# Altium PCB BMS.PcbDoc
Units mm, origin at the board's own origin, x right, y up, seen from the top; angles counter-clockwise.
Board outline 93 x 80.8 mm, 2 copper layers (Top Layer, Bottom Layer); 78 components, 53 nets, 226 pads, 51 vias.
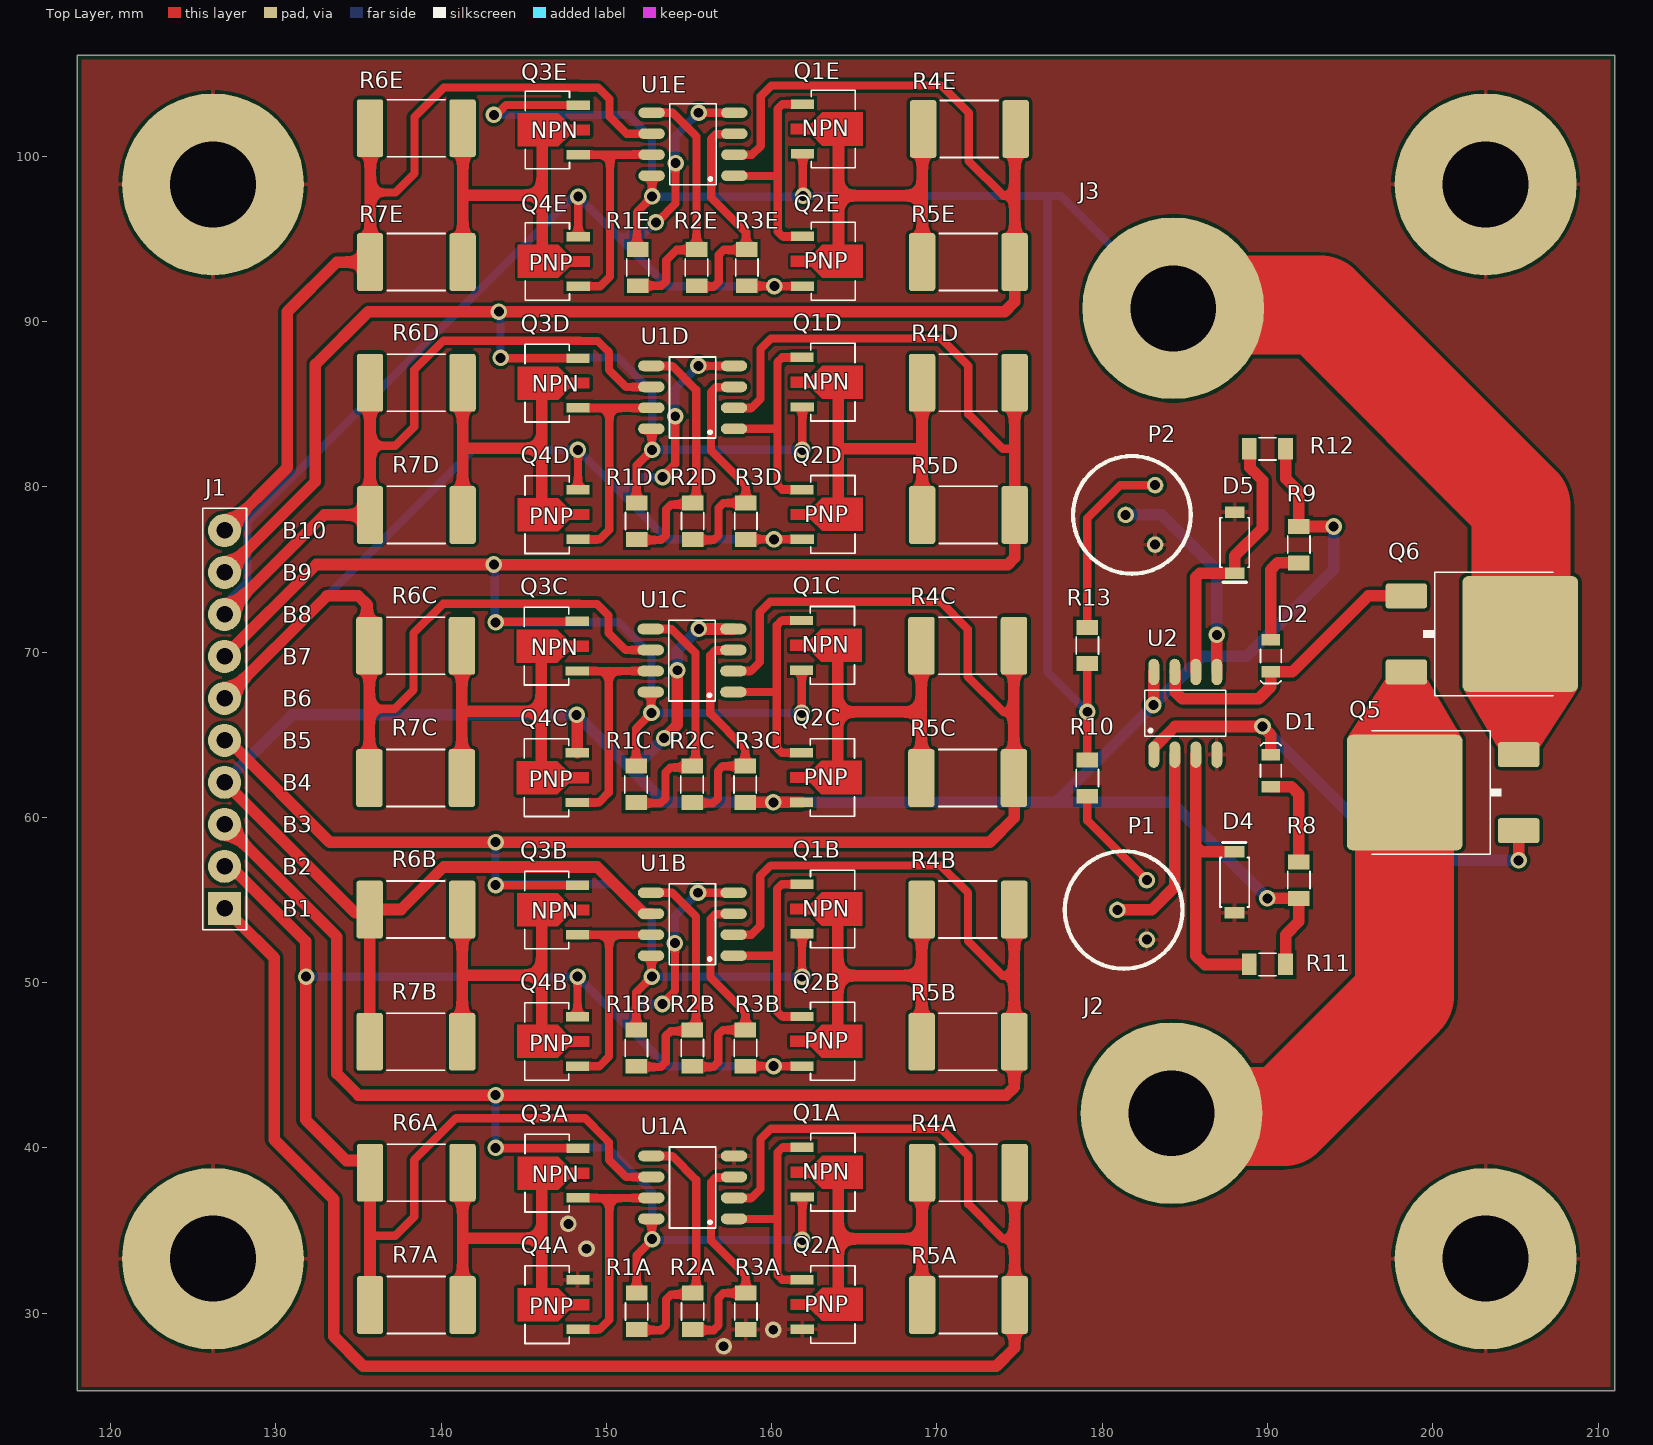
[diagram p0: Top Layer view]
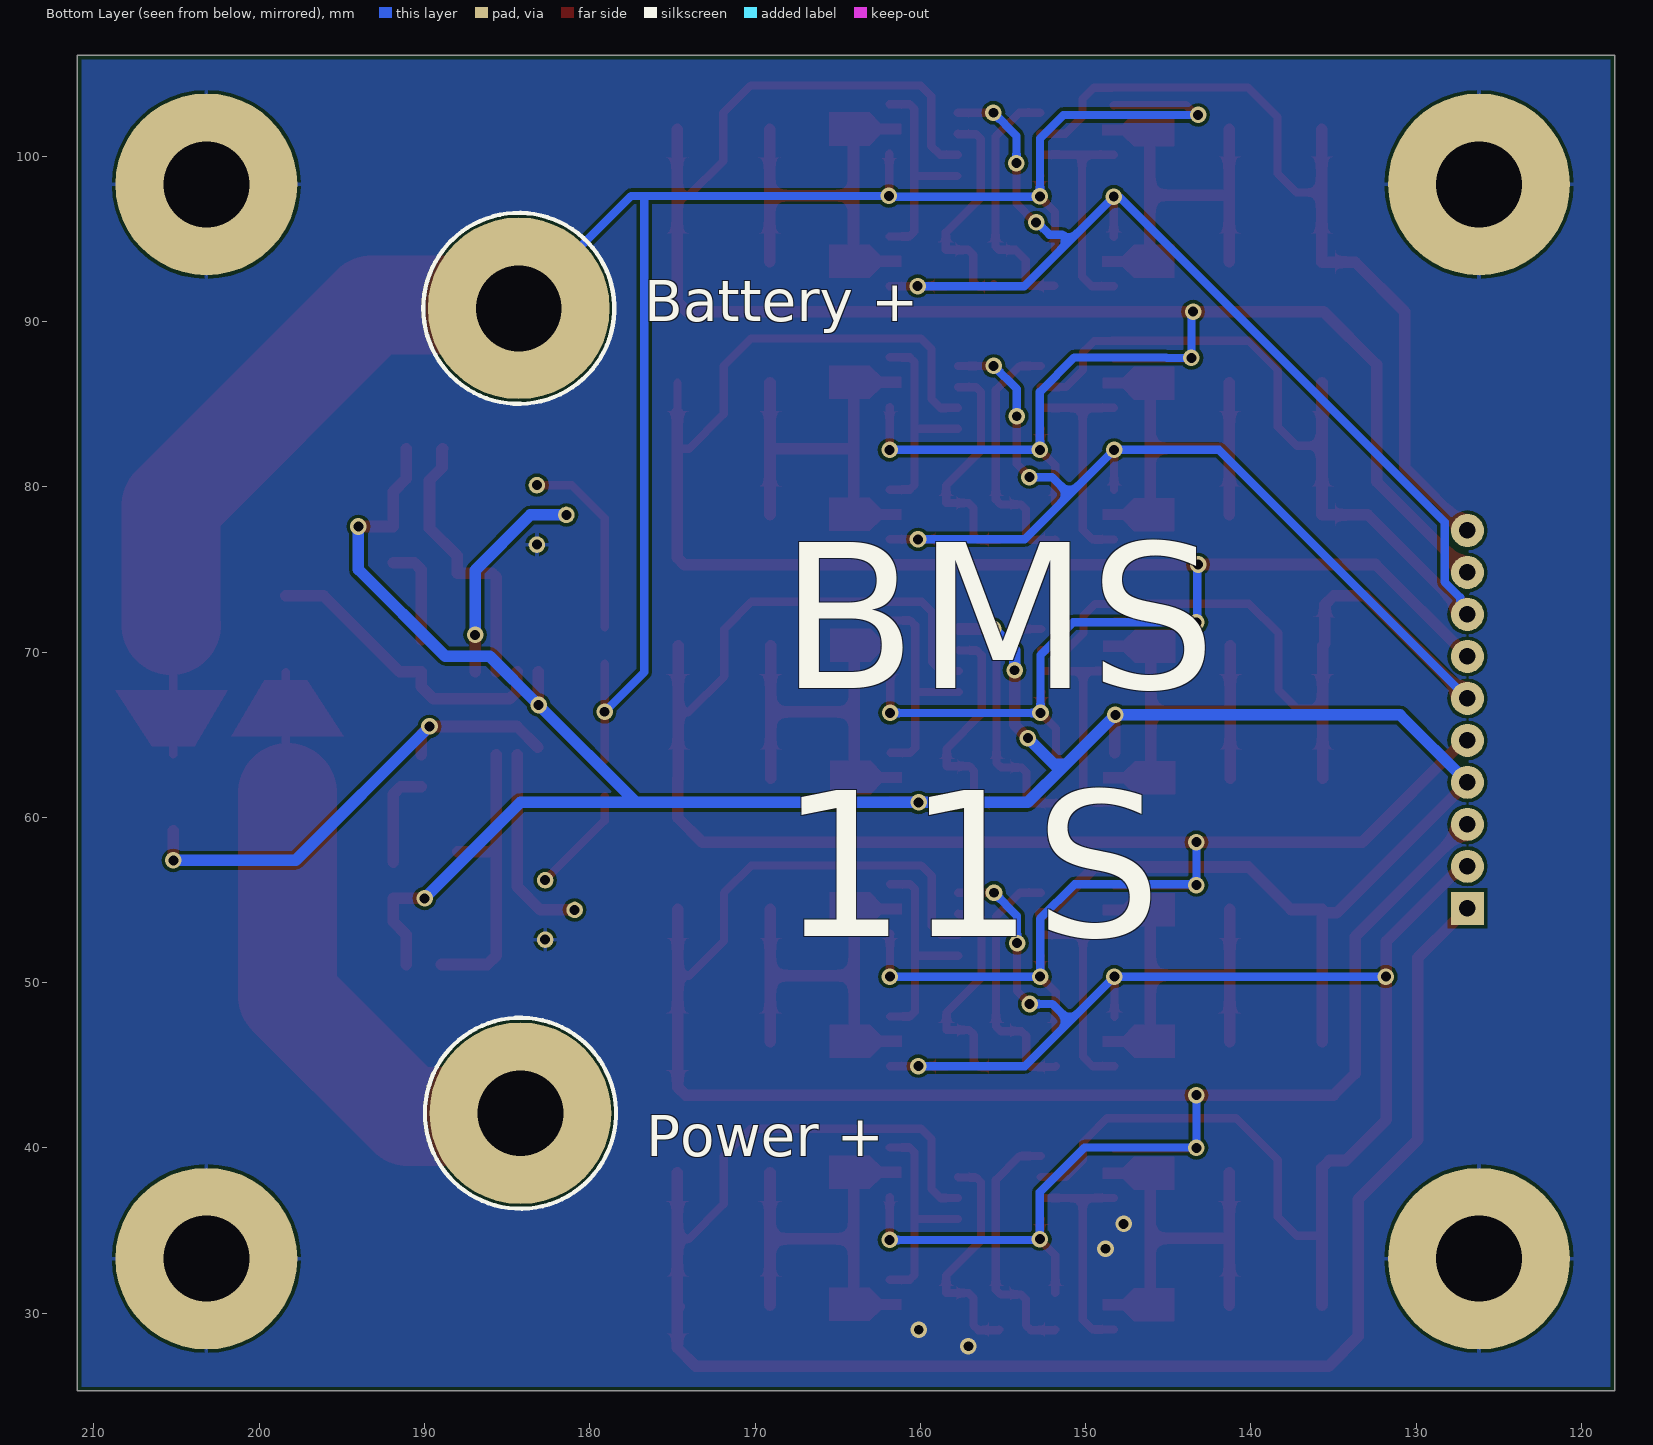
[diagram p1: Bottom Layer view, seen from below]
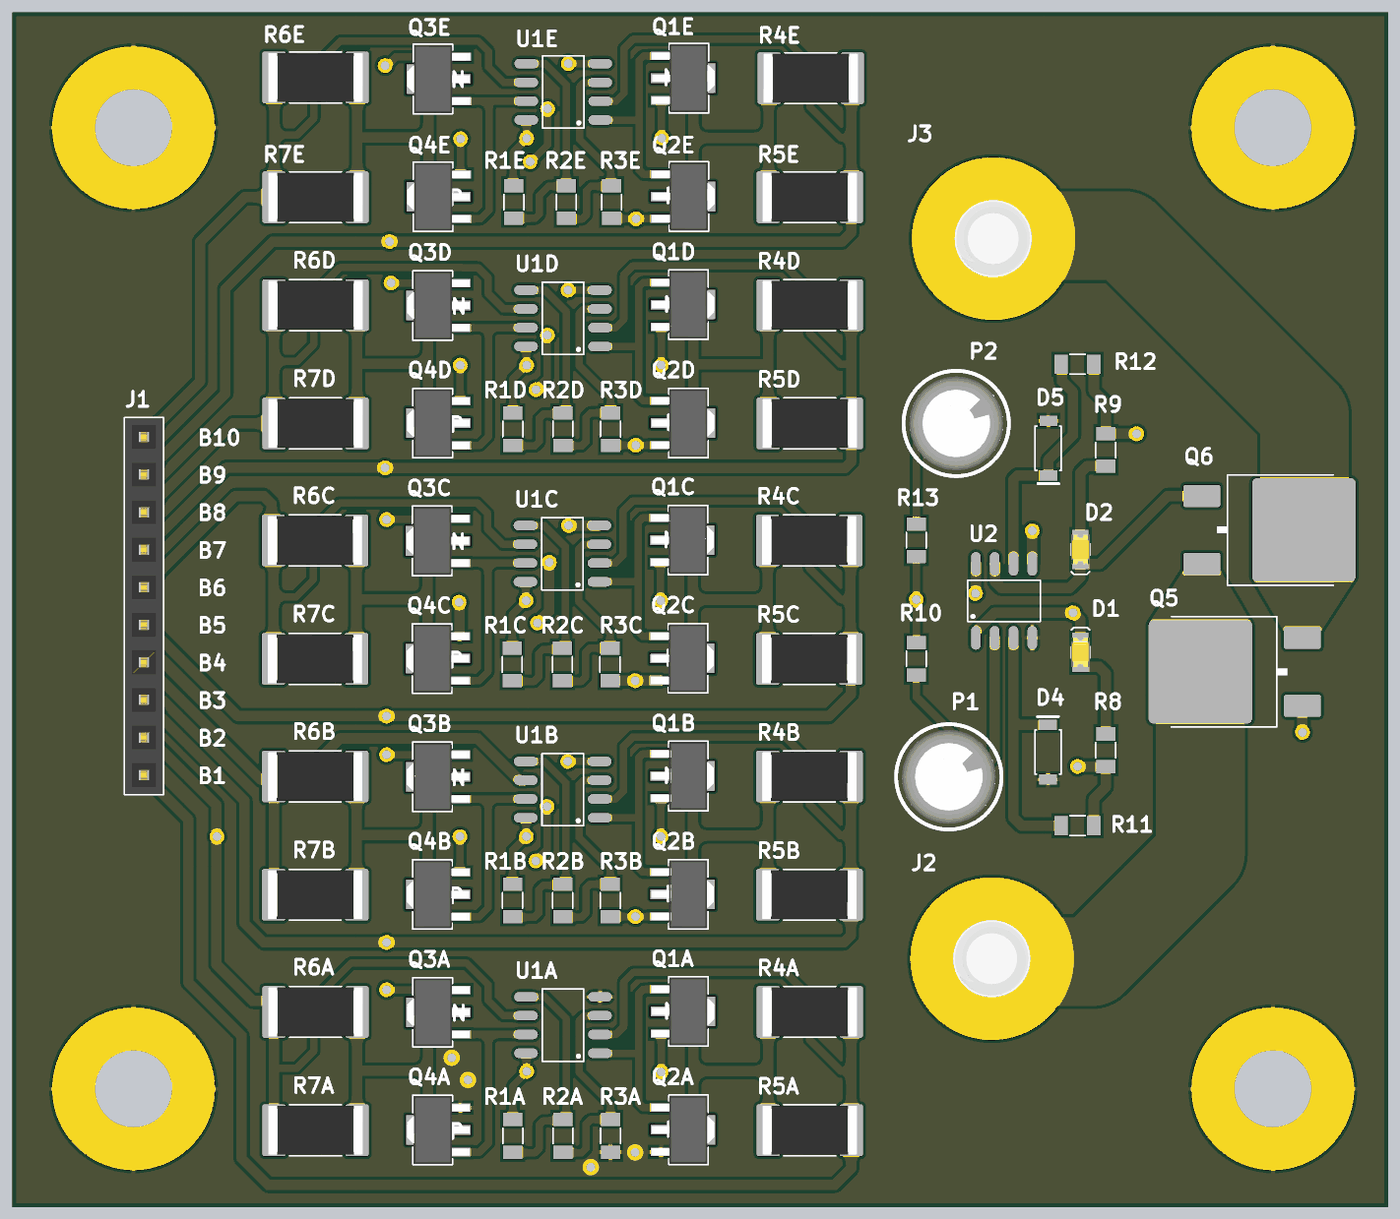
[diagram p2: 3D render of the assembled board from above, using the file's embedded part models]

## Layer stack, top to bottom
Top Solder: solder mask 0.0102, Solder Resist, Dk 3.5
Top Layer: signal copper 0.0356
Dielectric 1: dielectric 0.32, FR-4, Dk 4.8
Bottom Layer: signal copper 0.0356
Bottom Solder: solder mask 0.0102, Solder Resist, Dk 3.5

## Board outline
118,25.3 118,106.1 211,106.1 211,92.9 211,25.3

## Design rules (kind name [scope] priority, off if disabled: settings)
AcuteAngle [All] p1: minimum=3.50000000000000E+0001 checktracksonly=FALSE
BoardOutlineClearance "BoardOutlineClearance 1" [All] p1: gap=0.25 ignorepadtopadclearanceinfootprint=FALSE except(0: Arc-SplitContinuation Track-SplitContinuation SMDPad-SplitContinuation THPad-SplitContinuation Via-SplitContinuation Fill-SplitContinuation Poly-SplitContinuation Region-SplitContinuation Text-SplitContinuation) // Milling
Clearance "Clearance-1 1/2 Oz" [All] p1: gap=0.125 ignorepadtopadclearanceinfootprint=FALSE except(0.2: Arc-Fill Arc-Poly Track-Fill Track-Poly SMDPad-SMDPad SMDPad-Fill SMDPad-Poly THPad-Fill THPad-Poly Via-Fill Via-Poly Fill-Fill Fill-Poly Poly-Poly Poly-Region Poly-Text; 0.25: Arc-Hole Track-Hole SMDPad-Hole THPad-Hole Via-Hole Fill-Hole Poly-Hole Region-Hole Text-Hole) // Standart
ComponentClearance [All] p1: gap=0.1 collisioncheckmode=3 verticalgap=0.1 showdistances=FALSE
DiffPairsRouting "DiffPairsRouting 1/2 Oz" [All] p1: maxlimit=0.254 minlimit=0.125 mostfreqgap=0.254 toplayer_minwidth=0.125 toplayer_maxwidth=0.381 toplayer_prefwidth=0.381 bottomlayer_minwidth=0.125 bottomlayer_maxwidth=0.381 bottomlayer_prefwidth=0.381 maxuncoupledlength=12.7
HoleSize "Minimum HoleSize" [IsPad] p1: absolutevalues=TRUE maxlimit=5.9 minlimit=0.6 maxpercent=80.000 minpercent=20.000
HoleSize "Minimum HoleSize VIA 1" [IsVia] p2: absolutevalues=TRUE maxlimit=5.9 minlimit=0.3 maxpercent=80.000 minpercent=20.000 // Standart
HoleToHoleClearance Hole2HoleClearance [All] p1: gap=0.25 allowstackedmicrovias=FALSE
MinimumAnnularRing "Minimum AR VIA Standart" [All] p1: minimumring=0.15
MinimumAnnularRing "Minimum AR PAD Standart" [All] p2: minimumring=0.2
MinimumSolderMaskSliver "SolderMask Bridge Standart" [All] p1: minsoldermaskwidth=0.15 // All Masks
PlaneClearance "PlaneClearance-1 1/2 Oz" [All] p1: clearance=0.2 // Standart
PlaneConnect "TermalConnect-1 1/2 Oz" [All] p1: planeconnectstyle=Relief reliefexpansion=0.2 reliefentries=4 reliefconductorwidth=0.2 reliefairgap=0.2 // Standart
PolygonConnect "PolygonConnect-1 1/2 Oz" [All] p1: thpad.connectstyle=Relief thpad.reliefconductorwidth=0.254 thpad.reliefentries=4 thpad.polygonreliefangle="90 Angle" thpad.airgapwidth=0.2 smdpad.connectstyle=Relief smdpad.reliefconductorwidth=0.254 smdpad.reliefentries=4 smdpad.polygonreliefangle="90 Angle" smdpad.airgapwidth=0.2 via.connectstyle=Direct via.reliefconductorwidth=0.254 via.reliefentries=4 via.polygonreliefangle="90 Angle" via.airgapwidth=0.254 // Standart
RoomDefinition bal1 [InComponentClass('bal1')] p1: confinementstyle=ConfineIn formatcopy=TRUE lockcomponents=FALSE outline 134.228,27.324 176.265,27.324 176.265,43.326 134.228,43.326
RoomDefinition bal2 [InComponentClass('bal2')] p2: confinementstyle=ConfineIn formatcopy=TRUE lockcomponents=FALSE outline 134.209,43.249 176.246,43.249 176.246,59.251 134.209,59.251
RoomDefinition bal3 [InComponentClass('bal3')] p3: confinementstyle=ConfineIn formatcopy=TRUE lockcomponents=FALSE outline 134.19,59.206 176.227,59.206 176.227,75.208 134.19,75.208
RoomDefinition bal4 [InComponentClass('bal4')] p4: confinementstyle=ConfineIn formatcopy=TRUE lockcomponents=FALSE outline 134.228,75.125 176.265,75.125 176.265,91.127 134.228,91.127
RoomDefinition bal5 [InComponentClass('bal5')] p5: confinementstyle=ConfineIn formatcopy=TRUE lockcomponents=FALSE outline 134,91.1 176.3,91.1 176.3,105.9 134,105.9
RoutingCorners [All] p1 off: cornerstyle=45-Degree minsetback=2.54 maxsetback=2.54
RoutingVias [All] p1: holewidth=0.4 width=0.8 viastyle="Through Hole" minholewidth=0.3 minwidth=0.6 maxholewidth=5.9 maxwidth=8.9
SilkToSilkClearance Silk2SilkClearance [All] p1 off: silktosilkclearance=0.15
SilkToSolderMaskClearance Silk2SolderMaskClearance [IsPad] p1 off: minsilkscreentomaskgap=0.15 clearancetoexposedcopper=TRUE
SolderMaskExpansion SolderMaskExpansion-1 [All] p1: expansion=0.05 istentingtop=FALSE // Standart
UnRoutedNet [All] p1: checkbadconnections=TRUE
Width "Width 1/2 Oz" [All] p1: maxlimit=10 minlimit=0.125 preferedwidth=0.254 checkconnectedcopper=TRUE
19 further rules are at their usual default settings.

## Classes and differential pairs
component class BMS: D1 D2 D4 D5 J1 J2 J3 P1 P2 Q5 Q6 R8 R9 R10 R11 R12 R13 U2
component class bal5: Q1E Q2E Q3E Q4E R1E R2E R3E R4E R5E R6E R7E U1E
channel class Balancer: bal1 bal2 bal3 bal4
component class bal4: Q1D Q2D Q3D Q4D R1D R2D R3D R4D R5D R6D R7D U1D
component class bal3: Q1C Q2C Q3C Q4C R1C R2C R3C R4C R5C R6C R7C U1C
component class bal2: Q1B Q2B Q3B Q4B R1B R2B R3B R4B R5B R6B R7B U1B
component class bal1: Q1A Q2A Q3A Q4A R1A R2A R3A R4A R5A R6A R7A U1A

## Components (designator, comment, footprint, x,y, rotation, side; value= is the part's Value field where it differs from the comment)
D1 "LedB" "0805 LED" 190.2,62.825 r90 top
D2 "LedR" "0805 LED" 190.2,69.775 r270 top
D4 "Zener 3V" sod-123 188,54.225 r90 top
D5 "Zener 3V" sod-123 188.025,78.475 r270 top
J1 "PBS 10x1" PBS10 126.9,54.5 r90 top
J2 "Bolt M5" "Bolt M5" 184.2,42.1 r0 top
J3 "Bolt M5" "Bolt M5" 184.3,90.8 r0 top
P1 "3329H" 3329H 181.3,54.4 r90 top
P2 "3329H" 3329H 181.8,78.3 r90 top
Q1A "BCX54-16" SOT-89 162.349,38.531 r270 top (schematic designator Q1)
Q1B "BCX54-16" SOT-89 162.33,54.456 r270 top (schematic designator Q1)
Q1C "BCX54-16" SOT-89 162.311,70.413 r270 top (schematic designator Q1)
Q1D "BCX54-16" SOT-89 162.349,86.332 r270 top (schematic designator Q1)
Q1E "BCX54-16" SOT-89 162.369,101.65 r270 top (schematic designator Q1)
Q2A "BCX51-16" SOT-89 162.349,30.53 r270 top (schematic designator Q2)
Q2B "BCX51-16" SOT-89 162.33,46.455 r270 top (schematic designator Q2)
Q2C "BCX51-16" SOT-89 162.311,62.412 r270 top (schematic designator Q2)
Q2D "BCX51-16" SOT-89 162.349,78.331 r270 top (schematic designator Q2)
Q2E "BCX51-16" SOT-89 162.369,93.649 r270 top (schematic designator Q2)
Q3A "BCX54-16" SOT-89 147.778,38.476 r90 top (schematic designator Q3)
Q3B "BCX54-16" SOT-89 147.759,54.401 r90 top (schematic designator Q3)
Q3C "BCX54-16" SOT-89 147.74,70.358 r90 top (schematic designator Q3)
Q3D "BCX54-16" SOT-89 147.778,86.277 r90 top (schematic designator Q3)
Q3E "BCX54-16" SOT-89 147.798,101.594 r90 top (schematic designator Q3)
Q4A "BCX51-16" SOT-89 147.778,30.518 r90 top (schematic designator Q4)
Q4B "BCX51-16" SOT-89 147.759,46.443 r90 top (schematic designator Q4)
Q4C "BCX51-16" SOT-89 147.74,62.4 r90 top (schematic designator Q4)
Q4D "BCX51-16" SOT-89 147.778,78.319 r90 top (schematic designator Q4)
Q4E "BCX51-16" SOT-89 147.798,93.636 r90 top (schematic designator Q4)
Q5 "MOSFET-N" "D-Pak (TO-252AA)" 205.2,61.5 r90 top
Q6 "MOSFET-N" "D-Pak (TO-252AA)" 198.4,71.1 r270 top
R1A "10k" "0805 Resistor" 151.834,30.118 r90 top (schematic designator R1)
R1B "10k" "0805 Resistor" 151.815,46.043 r90 top (schematic designator R1)
R1C "10k" "0805 Resistor" 151.796,62 r90 top (schematic designator R1)
R1D "10k" "0805 Resistor" 151.834,77.919 r90 top (schematic designator R1)
R1E "10k" "0805 Resistor" 151.901,93.268 r90 top (schematic designator R1)
R2A "10k" "0805 Resistor" 155.223,30.118 r90 top (schematic designator R2)
R2B "10k" "0805 Resistor" 155.204,46.043 r90 top (schematic designator R2)
R2C "10k" "0805 Resistor" 155.185,62 r90 top (schematic designator R2)
R2D "10k" "0805 Resistor" 155.223,77.919 r90 top (schematic designator R2)
R2E "10k" "0805 Resistor" 155.457,93.268 r90 top (schematic designator R2)
R3A "10k" "0805 Resistor" 158.438,30.118 r90 top (schematic designator R3)
R3B "10k" "0805 Resistor" 158.419,46.043 r90 top (schematic designator R3)
R3C "10k" "0805 Resistor" 158.4,62 r90 top (schematic designator R3)
R3D "10k" "0805 Resistor" 158.438,77.919 r90 top (schematic designator R3)
R3E "10k" "0805 Resistor" 158.505,93.268 r90 top (schematic designator R3)
R4A "62R" "2512 Resistor" 171.9,38.5 r0 top (schematic designator R4)
R4B "62R" "2512 Resistor" 171.881,54.425 r0 top (schematic designator R4)
R4C "62R" "2512 Resistor" 171.862,70.382 r0 top (schematic designator R4)
R4D "62R" "2512 Resistor" 171.9,86.301 r0 top (schematic designator R4)
R4E "62R" "2512 Resistor" 171.967,101.65 r0 top (schematic designator R4)
R5A "62R" "2512 Resistor" 171.9,30.499 r0 top (schematic designator R5)
R5B "62R" "2512 Resistor" 171.881,46.424 r0 top (schematic designator R5)
R5C "62R" "2512 Resistor" 171.862,62.381 r0 top (schematic designator R5)
R5D "62R" "2512 Resistor" 171.9,78.3 r0 top (schematic designator R5)
R5E "62R" "2512 Resistor" 171.9,93.6 r0 top (schematic designator R5)
R6A "62R" "2512 Resistor" 138.499,38.5 r180 top (schematic designator R6)
R6B "62R" "2512 Resistor" 138.48,54.425 r180 top (schematic designator R6)
R6C "62R" "2512 Resistor" 138.461,70.382 r180 top (schematic designator R6)
R6D "62R" "2512 Resistor" 138.499,86.301 r180 top (schematic designator R6)
R6E "62R" "2512 Resistor" 138.5,101.7 r180 top (schematic designator R6)
R7A "62R" "2512 Resistor" 138.499,30.499 r180 top (schematic designator R7)
R7B "62R" "2512 Resistor" 138.48,46.424 r180 top (schematic designator R7)
R7C "62R" "2512 Resistor" 138.461,62.381 r180 top (schematic designator R7)
R7D "62R" "2512 Resistor" 138.499,78.3 r180 top (schematic designator R7)
R7E "62R" "2512 Resistor" 138.5,93.6 r180 top (schematic designator R7)
R8 "1k" "0805 Resistor" 191.9,56.2 r270 top
R9 "1k" "0805 Resistor" 191.9,76.5 r90 top
R10 "Res 100k" "0805 Resistor" 179.1,62.381 r90 top
R11 "4k" "0805 Resistor" 190,51.1 r0 top
R12 "4k" "0805 Resistor" 190,82.301 r0 top
R13 "Res 100k" "0805 Resistor" 179.1,70.4 r270 top
U1A "OpAmp" SOIC-8 157.723,35.706 r180 top (schematic designator U1)
U1B "OpAmp" SOIC-8 157.704,51.631 r180 top (schematic designator U1)
U1C "OpAmp" SOIC-8 157.685,67.588 r180 top (schematic designator U1)
U1D "OpAmp" SOIC-8 157.723,83.507 r180 top (schematic designator U1)
U1E "OpAmp" SOIC-8 157.743,98.824 r180 top (schematic designator U1)
U2 "LM290" SOIC-8 183.13,63.8 r90 top

## Footprints (in the part's own frame and the unit in brackets; to place one, negate y for a bottom-side part, rotate by r counter-clockwise, add the part's x,y. Pads: shape width x height; smd on the part's side, far side on the other; paste and mask are expansions set on the pad)
"0805 LED" [mm]
  rect 0.7x1.1 smd: 1(-0.975,0) 2(0.975,0)
  silkscreen extent -0.4,-0.63 1.68,0.63, body extent -1.01,-0.62 1.01,0.62, height 1.1
"0805 Resistor" [mm]
  rect 0.9x1.3 smd: 1(-1.1,0) 2(1.1,0)
  silkscreen extent -0.53,-0.67 0.53,0.67, body extent -1.05,-0.67 1.05,0.68, height 0.6
"2512 Resistor" [mm]
  rrect20% 1.6x3.5 smd: 1(-2.8,0) 2(2.8,0)
  silkscreen extent -1.75,-1.73 1.75,1.73, body extent -3.2,-1.65 3.2,1.65, height 0.65
3329H [mm]
  round 1 hole 0.6: 1(-1.8,-1.4) 2(0,0.38) 3(1.8,-1.4)
  silkscreen extent -3.56,-3.56 3.56,3.56, body extent -3.18,-3.18 3.18,3.18, height 4.57
"Bolt M5" [mm]
  round 11 hole 5.2: 1(0,0)
  body extent -4.75,-4.75 4.75,4.75, height 9.5
"D-Pak (TO-252AA)" [mm]
  rrect20% 1.5x2.5 smd: 1(-2.3,0) 3(2.3,0)
  rrect10% 7x7 smd: 2(0,6.9)
  silkscreen extent -3.72,1.03 3.75,8.87, body extent -3.38,-0.65 3.35,9.45, height 2.37
PBS10 [mm]
  rect 2x2 hole 1: 1(0,0)
  round 2 hole 1: 2(2.54,0) 3(5.08,0) 4(7.62,0) 5(10.16,0) 6(12.7,0) 7(15.24,0) 8(17.78,0) 9(20.32,0) 10(22.86,0)
  silkscreen extent -1.3,-1.33 24.2,1.33, body extent -1.25,-1.27 24.15,1.27, height 8.4
sod-123 [mm]
  rect 0.7x1.2 smd: 1(0,0) 2(3.7,0)
  silkscreen extent 0.35,-0.9 4.25,0.87, body extent 0,-0.8 3.7,0.8
SOIC-8 [mm]
  oval 1.6x0.65 smd: 1(0,0) 2(0,-1.27) 3(0,-2.54) 4(0,-3.81) 5(5,-3.81) 6(5,-2.54) 7(5,-1.27) 8(5,0)
  silkscreen extent 1.1,-4.35 3.9,0.55, body extent -0.36,-4.35 5.41,0.55, height 1.45
SOT-89 [mm]
  rect 0.57x1.4 smd: 1(-1.5,-0.5) 3(1.5,-0.5)
  round 0.025 smd: 2(0.031,1.677)
  Top Layer region: -0.325,0.025 -0.325,-1.198 0.325,-1.198 0.325,0.025 1,0.7 1,3.15 -1,3.15 -1,0.7
  silkscreen extent -2.35,0.03 2.35,2.7, body extent -2.3,-1.15 2.3,3.1, height 1.35

## Part data
D1: library part "Led Yellow", "SMD 1608, 247mcd, 120°, 592nM (High Bright Yellow)", Manufacturer="Taiwan Oasis Technology", Part Number=TO-1608BC-MYF, ComponentLink1Description=Chip&Dip, ComponentLink1URL=https://www.chipdip.ru/product/gnl-0603ubc, Type=Diode
D2: library part "Led Red", "SMD 1608, 112mcd, 120°, 630nM (Ultra Bright Red)", Manufacturer="Taiwan Oasis Technology", Part Number=TO-1608BC-MRE, ComponentLink1Description=Chip&Dip, ComponentLink1URL=https://www.chipdip.ru/product/to-1608bc-mre, Type=Diode
D4 D5: library part "Zener Diode 3V", "500mW", Manufacturer="Yangzhou Yangjie Electronic Technology", Part Number=MMSZ5225B, ComponentLink1Description=Chip&Dip, ComponentLink1URL=https://www.chipdip.ru/product/mmsz5225b, ComponentLink2Description=DataSheet, ComponentLink2URL=https://static.chipdip.ru/lib/152/DOC001152772.pdf, Type=Diode
J1: library part "Conn 10 (PBS)", "Female", Manufacturer="Ningbo connfly electronic", Part Number=DS1023-1*10S21, ComponentLink1Description=Chip&Dip, ComponentLink1URL=https://www.chipdip.ru/product/pbs-10r, Type=Connector
J2 J3: library part "Conn Bolt M5", "Bolt M5 high corrent connector", ComponentLink1Description=Chip&Dip, ComponentLink2Description=Datasheet, Type=Connetctor
P1 P2: library part "Pot 15k", "Potentiometr 15k 0.5W", Manufacturer=Vishay, Part Number=M64X203KB40, ComponentLink2Description=Datasheet, ComponentLink2URL=https://static.chipdip.ru/lib/250/DOC000250619.pdf, Type=Potentiometer
Q1A Q1B Q1C Q1D Q1E Q3A Q3B Q3C Q3D Q3E: library part "NPN [BC817]", "NPN general-purpose transistors", Manufacturer=Nexperia, Part Number=BC817-40,215, ComponentLink1Description=DataSheet, ComponentLink1URL=https://static.chipdip.ru/lib/156/DOC000156781.pdf, ComponentLink2Description=Chip&Dip, ComponentLink2URL=https://www.chipdip.ru/product/bc817-40, Type=Transistor
Q2A Q2B Q2C Q2D Q2E Q4A Q4B Q4C Q4D Q4E: library part "PNP [BC807]", "PNP general-purpose transistors", Manufacturer=Nexperia, Part Number=BC807,215, ComponentLink1Description=DataSheet, ComponentLink1URL=https://static.chipdip.ru/lib/078/DOC001078227.pdf, ComponentLink2Description=Chip&Dip, ComponentLink2URL=https://www.chipdip.ru/product/bc807.215, Type=Transistor
Q5 Q6: library part "MOSFET-N [IRLR]", "Trans MOSFET N-CH Si 55V 89A 3-Pin(2+Tab) DPAK Tube", Manufacturer="International Rectifier", Part Number=IRLR3705ZTRPBF, ComponentLink1Description=DataSheet, ComponentLink1URL=https://static.chipdip.ru/lib/292/DOC000292789.pdf, ComponentLink2Description=Chip&Dip, ComponentLink2URL=https://www.chipdip.ru/product/irlr3705zpbf, Type=Transistor
R1A R1B R1C R1D R1E R2A R2B R2C R2D R2E R3A R3B R3C R3D R3E: library part "Res 10k (0805)", "0.125W 0805 10k, 1%", Manufacturer=Taiwan, Part Number=RC0805FR-0710KL, ComponentLink1Description=Chip&Dip, ComponentLink1URL=https://www.chipdip.ru/product0/9000079514, Type=Resistor
R4A R4B R4C R4D R4E R5A R5B R5C R5D R5E R6A R6B R6C R6D R6E R7A R7B R7C R7D R7E: library part "Res 62R (2512)", "1W 2512 62R, 1%", Manufacturer=Taiwan, Part Number=RC2512FR-0762RL, ComponentLink1Description=Chip&Dip, ComponentLink1URL=https://www.chipdip.ru/product0/9000190086, Type=Resistor
R8 R9: library part "Res 3.9k (0805)", "0.125W 0805 3.9k, 1%", Manufacturer=Taiwan, Part Number=RC0805FR-073K9L, ComponentLink1Description=Chip&Dip, ComponentLink1URL=https://www.chipdip.ru/product0/9000079500, Type=Resistor
R10 R13: library part "Res 100k (0805)", "0.125W 0805 100k, 1%", Manufacturer=Taiwan, Part Number=RC0805FR-07100KL, ComponentLink1Description=Chip&Dip, ComponentLink1URL=https://www.chipdip.ru/product0/9000079538, Type=Resistor
R11 R12: library part "Res 6.8k (0805)", "0.125W 0805 6.8k, 1%", Manufacturer=Taiwan, Part Number=RC0805FR-076K8L, ComponentLink1Description=Chip&Dip, ComponentLink1URL=https://www.chipdip.ru/product0/9000079506, Type=Resistor
U1A U1B U1C U1D U1E: library part "OpAmp [LMV358]", "Low Voltage Operational Amplifiers", Manufacturer="Texas Instruments", Part Number=LMV358IDR, ComponentLink1Description=DataSheet, ComponentLink1URL=https://static.chipdip.ru/lib/321/DOC000321492.pdf, ComponentLink2Description=Chip&Dip, ComponentLink2URL=https://www.chipdip.ru/product/lmv358idr-pbf, Type=IC
U2: library part "Comp 2x", "LM290 SOIC-8", ComponentLink1Description=DataSheet, ComponentLink1URL=https://static.chipdip.ru/lib/938/DOC011938774.pdf, ComponentLink2Description=ChipDip, ComponentLink2URL=https://www.chipdip.ru/product/lm2903d-stm

## Free pads (board coordinates)
  round 11 hole 5.2: 3(126.2,33.3) 3(126.2,98.3) 3(203.2,33.3) 3(203.2,98.3)

## Via types
v1: diameter 1, hole 0.6, Top Layer to Bottom Layer, 51 vias

## Nets (pads, with @x,y where several pads share a name; then routed paths per layer and width w, separated by ;. In a path a pad name is that pad's centre, name@x,y a point inside that pad or via, vN(x,y) a via of type N, cw(c..) or ccw(c..) an arc to the next point about the centre after c; other vN are vias at no path point)
1IN+: D4.2 R11.1 U2.3 | length 18.2
  Top Layer w0.7: U2.3 185.67,58.265 ; D4.2 186.01,57.925 185.67,58.265 ; R11.1@188.987,51.1 186.2,51.1 185.67,51.63 185.67,57.925 185.67,58.265
1IN+A: R2A.1 R3A.2 U1A.3 | length 14.2
  Top Layer w0.5: R2A.1 155.266,28.975 156.494,28.975 156.787,29.268 156.787,30.925 157.08,31.218 R3A.2 158.438,32.277 156.326,34.389 156.326,37.924 156.619,38.217 157.694,38.217 U1A.3
1IN+B: R2B.1 R3B.2 U1B.3 | length 14.2
  Top Layer w0.5: R2B.1 155.247,44.9 156.475,44.9 156.768,45.193 156.768,46.85 157.061,47.143 R3B.2 158.419,48.202 156.307,50.314 156.307,53.849 156.6,54.142 157.675,54.142 U1B.3
1IN+C: R2C.1 R3C.2 U1C.3 | length 14.2
  Top Layer w0.5: R2C.1 155.228,60.857 156.456,60.857 156.749,61.15 156.749,62.807 157.042,63.1 R3C.2 158.4,64.159 156.288,66.271 156.288,69.806 156.581,70.099 157.656,70.099 U1C.3
1IN+D: R2D.1 R3D.2 U1D.3 | length 14.2
  Top Layer w0.5: R2D.1 155.266,76.776 156.494,76.776 156.787,77.069 156.787,78.726 157.08,79.019 R3D.2 158.438,80.078 156.326,82.19 156.326,85.725 156.619,86.018 157.694,86.018 U1D.3
1IN+E: R2E.1 R3E.2 U1E.3 | length 14.1
  Top Layer w0.5: R2E.1@155.561,92.272 R2E.1 155.5,92.125 156.514,92.125 156.807,92.418 156.807,94.043 157.1,94.336 158.458,94.336 158.458,95.395 156.346,97.507 156.346,101.043 156.639,101.336 157.714,101.336 U1E.3
1IN-: P1.2 U2.2 | length 12.1
  Top Layer w0.7: P1.2 183,54.4 184.4,55.8 U2.2
1OUTA: Q1A.1 Q2A.1 U1A.1 | length 13.3
  Top Layer w0.5: U1A.1 160.345,35.706 ; Q2A.1 160.643,32.03 160.35,32.323 160.35,35.941 160.35,39.738 160.643,40.031 Q1A.1
1OUTB: Q1B.1 Q2B.1 U1B.1 | length 13.2
  Top Layer w0.5: U1B.1 160.278,51.631 ; Q2B.1 160.624,47.955 160.331,48.248 160.331,51.866 160.331,55.663 160.624,55.956 Q1B.1
1OUTC: Q1C.1 Q2C.1 U1C.1 | length 13.1
  Top Layer w0.5: U1C.1 160.162,67.588 ; Q2C.1 160.605,63.912 160.312,64.205 160.312,67.588 160.312,67.823 160.312,71.62 160.605,71.913 Q1C.1
1OUTD: Q1D.1 Q2D.1 U1D.1 | length 13.2
  Top Layer w0.5: U1D.1 160.304,83.507 ; Q2D.1 160.643,79.831 160.35,80.124 160.35,83.742 160.35,87.539 160.643,87.832 Q1D.1
1OUTE: Q1E.1 Q2E.1 U1E.1 | length 13.3
  Top Layer w0.5: U1E.1@157.767,98.8 160.37,98.8 ; Q2E.1 160.663,95.149 160.37,95.441 160.37,98.8 ; Q1E.1 160.663,103.15 160.37,102.857 160.37,98.8
2IN+: P2.2 U2.5 | length 13.1
  Top Layer w0.7: U2.5 v1(186.94,71.04)
  Bottom Layer w0.7: P2.2 183.6,78.3 186.94,74.96 v1(186.94,71.04)
2IN+A: R1A.1 R2A.2 U1A.5 | length 15.5
  Top Layer w0.5: R1A.1 151.877,28.975 153.319,28.975 153.612,29.268 153.612,30.841 153.905,31.134 155.139,31.134 R2A.2 155.237,31.218 155.437,31.418 155.437,38.072 153.993,39.516 U1A.5
2IN+B: R1B.1 R2B.2 U1B.5 | length 15.5
  Top Layer w0.5: R1B.1 151.858,44.9 153.3,44.9 153.593,45.193 153.593,46.766 153.886,47.059 155.12,47.059 R2B.2 155.218,47.143 155.418,47.343 155.418,53.997 153.974,55.441 U1B.5
2IN+C: R1C.1 R2C.2 U1C.5 | length 15.5
  Top Layer w0.5: R1C.1 151.839,60.857 153.281,60.857 153.574,61.15 153.574,62.723 153.867,63.016 155.101,63.016 R2C.2 155.199,63.1 155.399,63.3 155.399,69.954 153.955,71.398 U1C.5
2IN+D: R1D.1 R2D.2 U1D.5 | length 15.5
  Top Layer w0.5: R1D.1 151.877,76.776 153.319,76.776 153.612,77.069 153.612,78.642 153.905,78.935 155.139,78.935 R2D.2 155.237,79.019 155.437,79.219 155.437,85.873 153.993,87.317 U1D.5
2IN+E: R1E.1 R2E.2 U1E.5 | length 15.2
  Top Layer w0.5: R1E.1 153.339,92.168 153.632,92.461 153.632,93.729 154.239,94.336 R2E.2@155.243,94.336 ; U1E.5 154.013,102.634 155.457,101.19 155.457,94.536 R2E.2@155.257,94.336
2IN-: D5.2 R12.1 U2.6 | length 16.7
  Top Layer w0.7: U2.6 185.67,74.53 185.915,74.775 D5.2 188.025,75.825 189.7,77.5 189.7,80.4 188.942,81.158 188.942,82.258 R12.1
2OUTA: Q3A.1 Q4A.1 U1A.7 | length 14
  Top Layer w0.5: Q4A.1 149.591,29.018 150.183,29.61 150.183,36.976 ; Q3A.1 150.183,36.976 ; U1A.7 150.183,36.976
2OUTB: Q3B.1 Q4B.1 U1B.7 | length 14
  Top Layer w0.5: Q4B.1 149.572,44.943 150.164,45.535 150.164,52.901 ; Q3B.1 150.164,52.901 ; U1B.7 150.164,52.901
2OUTC: Q3C.1 Q4C.1 U1C.7 | length 14
  Top Layer w0.5: Q4C.1 149.553,60.9 150.145,61.492 150.145,68.858 ; Q3C.1 150.145,68.858 ; U1C.7 150.145,68.858
2OUTD: Q3D.1 Q4D.1 U1D.7 | length 14
  Top Layer w0.5: Q4D.1 149.591,76.819 150.183,77.411 150.183,84.777 ; Q3D.1 150.183,84.777 ; U1D.7 150.183,84.777
2OUTE: Q3E.1 Q4E.1 U1E.7 | length 14
  Top Layer w0.5: Q4E.1 149.636,92.136 150.227,92.727 150.227,100.094 ; Q3E.1 150.227,100.094 ; U1E.7 152.737,100.1 150.593,100.1 150.587,100.094 150.227,100.094
B1: J1.1 R4A.2 R5A.2 U1A.2 | length 106.7
  Top Layer w0.5: U1A.2 158.79,36.976 159.327,37.513 159.327,40.532 159.962,41.167 170.249,41.167 171.9,39.516 171.9,36.595 173.996,34.499 174.7,34.499
  Top Layer w0.7: J1.1 127.55,53.85 129.9,51.5 129.9,40.5 133.5,36.9 133.5,28.6 135.3,26.8 173.6,26.8 174.7,27.9 174.7,30.299 174.6,30.399 R5A.2 174.7,34.499 R4A.2
B2: J1.2 Q2B.3 Q4B.3 R3B.1 R6A.2 R7A.2 U1A.6 U1B.4 | length 104.1
  Top Layer w0.5: 135.699,34.69 137.229,34.69 138.372,35.833 138.372,39.262 140.91,41.8 148.709,41.8 149.873,40.636 150.166,40.343 150.166,39.279 151.199,38.246 U1A.6 ; Q4B.3 v1(148.259,50.361) v1@148.259,50.441 ; v1(153.386,48.71) 153.386,48.742 154.148,49.504 v1(154.148,52.393) ; v1(155.545,55.441) U1B.4 ; R3B.1 158.425,44.949 v1(160.124,44.949) 161.824,44.949 Q2B.3
  Top Layer w0.7: J1.2 127.252,57.04 127.821,56.47 127.83,56.47 131.8,52.5 131.8,41.7 134.259,39.241 135.249,39.241 135.699,38.791 135.699,34.69 R7A.2
  Bottom Layer w0.5: v1(131.839,50.361) v1(148.259,50.361) 150.965,47.655 ; v1(153.386,48.71) 152.02,48.71 150.965,47.655 ; v1(154.148,52.393) 154.148,54.044 v1(155.545,55.441) ; v1(160.124,44.949) 153.671,44.949 150.965,47.655
B3: J1.3 Q1A.3 Q3A.3 R1A.2 R4B.2 R5B.2 U1A.8 U1B.2 | length 133.6
  Top Layer w0.5: v1(143.3,40) 143.324,39.976 Q3A.3 ; R1A.2 151.834,33.5 152.77,34.436 v1(152.77,34.481) ; U1A.8 152.747,35.682 v1@152.747,34.459 ; U1B.2 158.771,52.901 159.308,53.438 159.308,56.457 159.943,57.092 170.23,57.092 171.881,55.441 171.881,52.52 173.976,50.424 174.681,50.424 ; Q1A.3 161.858,37.022 161.858,34.445 v1(161.867,34.436)
  Top Layer w0.7: J1.3 133.7,52.78 133.7,44.5 135,43.2 174.2,43.2 174.681,43.681 R5B.2 174.681,50.424 R4B.2
  Bottom Layer w0.5: v1(143.3,43.2) v1(143.3,40) 143.324,40.024 150.076,40.024 152.77,37.33 152.77,34.436 v1(161.867,34.436)
B4: J1.4 Q2C.3 Q4C.3 R3C.1 R6B.2 R7B.2 R8.2 R9.2 R11.2 R12.2 U1B.6 U1C.4 U2.8 | length 167.6
  Top Layer w0.7: J1.4 134.8,54.22 135.475,54.22 R6B.2 ; R7B.2 R6B.2 ; v1(148.2,66.2) 148.24,66.16 Q4C.3 ; U1B.6 152.279,54.171 149.45,57 140.15,57 137.575,54.425 R6B.2 ; v1(153.5,64.8) 154.3,65.6 v1(154.3,68.9) ; v1(155.6,71.4) 155.602,71.398 U1C.4 ; R3C.1 158.406,60.906 v1(160.105,60.906) 161.805,60.906 Q2C.3 ; v1(183.1,66.8) 183.13,66.83 U2.8 ; v1(190,55.1) R8.2 191.9,53.7 191.1,52.9 R11.2 ; R12.2 191.1,80.5 191.9,79.7 R9.2 192.1,77.6 v1(194,77.6)
  Bottom Layer w0.7: J1.4 130.98,66.2 v1(148.2,66.2) 151.2,63.2 ; v1(153.5,64.8) 151.9,63.2 151.2,63.2 ; v1(154.3,68.9) 154.3,70.1 v1(155.6,71.4) ; v1(190,55.1) 184.194,60.906 177.206,60.906 ; v1(194,77.6) 194,75 188.75,69.75 186.05,69.75 v1(183.1,66.8) 177.206,60.906 ; 151.2,63.2 153.494,60.906 v1(160.105,60.906) 177.206,60.906
B5: J1.5 Q1B.3 Q3B.3 R1B.2 R4C.2 R5C.2 U1B.8 U1C.2 | length 124.3
  Top Layer w0.5: v1(143.3,55.9) 143.301,55.901 Q3B.3 ; R1B.2 151.815,49.425 v1(152.751,50.361) 152.727,50.384 152.727,51.607 U1B.8 ; U1C.2 158.752,68.858 159.289,69.395 159.289,72.414 159.924,73.049 170.211,73.049 171.862,71.398 171.862,68.538 174.018,66.382 174.662,66.382 ; Q1B.3 161.839,52.947 161.839,50.37 v1(161.848,50.361)
  Top Layer w0.7: J1.5 127.107,64.66 133.267,58.5 173.2,58.5 174.691,59.991 174.691,62.352 R5C.2 174.662,66.382 R4C.2
  Bottom Layer w0.5: v1(143.3,55.9) v1@143.6,55.9 ; v1(143.3,58.5) 143.3,56.298 143.649,55.949 150.672,55.949 152.751,53.87 v1(152.751,50.361) v1(161.848,50.361)
B6: J1.6 Q2D.3 Q4D.3 R3D.1 R6C.2 R7C.2 U1C.6 U1D.4 | length 105.7
  Top Layer w0.5: 135.661,66.572 137.191,66.572 138.334,67.715 138.334,71.144 140.112,72.922 148.367,72.922 148.378,72.911 149.442,72.911 149.835,72.518 150.128,72.225 150.128,71.161 151.161,70.128 U1C.6 ; Q4D.3 v1(148.278,82.237) v1@148.278,82.317 ; v1(153.405,80.586) 153.405,80.618 154.167,81.38 v1(154.167,84.269) ; v1(155.564,87.317) U1D.4 ; R3D.1 158.444,76.825 v1(160.143,76.825) 161.843,76.825 Q2D.3
  Top Layer w0.7: J1.6 133.1,73.4 135,73.4 135.528,72.872 135.528,70.515 R6C.2 135.661,66.572 R7C.2
  Bottom Layer w0.5: J1.6 141.937,82.237 v1(148.278,82.237) 150.984,79.531 ; v1(153.405,80.586) 152.039,80.586 150.984,79.531 ; v1(154.167,84.269) 154.167,85.92 v1(155.564,87.317) ; v1(160.143,76.825) 153.69,76.825 150.984,79.531
B7: J1.7 Q1C.3 Q3C.3 R1C.2 R4D.2 R5D.2 U1C.8 U1D.2 | length 124.7
  Top Layer w0.5: v1(143.3,71.8) 143.329,71.829 148.211,71.829 Q3C.3 ; R1C.2 151.796,65.382 v1(152.732,66.318) 152.709,66.342 152.709,67.565 U1C.8 ; U1D.2 158.79,84.777 159.327,85.314 159.327,88.333 159.962,88.968 170.249,88.968 171.9,87.317 171.9,84.396 173.995,82.301 174.7,82.301 ; Q1C.3 161.82,68.904 161.82,66.327 v1(161.829,66.318) ; R4D.2@174.7,84.552 R4D.2
  Top Layer w0.7: J1.7 132.46,75.3 v1(143.2,75.3) 143.21,75.29 174.29,75.29 174.7,75.7 174.7,82.301 R4D.2@174.7,84.552
  Bottom Layer w0.5: v1(143.2,75.3) 143.25,75.25 143.25,71.85 v1(143.3,71.8) 150.759,71.8 152.732,69.827 v1(152.732,66.318) v1(161.829,66.318)
B8: J1.8 Q2E.3 Q4E.3 R3E.1 R6D.2 R7D.2 U1D.6 U1E.4 | length 109.3
  Top Layer w0.5: 135.699,82.491 137.229,82.491 138.372,83.634 138.372,87.063 140.15,88.841 148.405,88.841 148.416,88.83 149.48,88.83 149.873,88.437 150.166,88.144 150.166,87.08 151.199,86.047 U1D.6 ; Q4E.3 v1(148.298,97.554) v1@148.298,97.634 ; v1(153,96) 153.054,96 154.187,97.133 v1(154.187,99.586) ; v1(155.584,102.634) U1E.4 ; R3E.1@158.458,92.136 158.464,92.142 v1(160.163,92.142) 161.863,92.142 Q2E.3
  Top Layer w0.7: J1.8 132.92,78.3 R7D.2 ; R7D.2@135.699,78.5 135.699,82.491 R6D.2
  Bottom Layer w0.5: J1.8 126.9,72.686 127.34,73.126 127.34,73.315 128.275,74.25 128.275,77.875 147.859,97.459 148.202,97.459 v1(148.298,97.554) 151.004,94.848 ; v1(153,96) 152.946,96 152.201,95.255 151.41,95.255 151.004,94.848 ; v1(154.187,99.586) 154.187,101.237 v1(155.584,102.634) ; v1(160.163,92.142) 153.71,92.142 151.004,94.848
B9: J1.9 Q1D.3 Q3D.3 R1D.2 R4E.2 R5E.2 U1D.8 U1E.2 | length 131.7
  Top Layer w0.5: v1(143.6,87.8) 143.623,87.777 Q3D.3 ; R1D.2 151.834,81.301 v1(152.77,82.237) 152.746,82.261 152.746,83.484 U1D.8 ; U1E.2 158.81,100.094 159.347,100.631 159.347,103.65 159.982,104.285 170.269,104.285 171.92,102.634 171.92,99.713 174.015,97.618 174.72,97.618 ; Q1D.3 161.858,84.823 161.858,82.246 v1(161.867,82.237)
  Top Layer w0.7: J1.9 132.4,80.32 132.4,87.4 135.6,90.6 v1(143.5,90.6) 174.1,90.6 174.7,91.2 R5E.2 ; R5E.2@174.72,93.617 174.72,97.618 R4E.2@174.72,101.618
  Bottom Layer w0.5: v1(143.5,90.6) 143.596,90.504 143.596,90.151 143.6,90.146 v1(143.6,87.8) 145.1,87.8 ; 145.125,87.825 150.691,87.825 152.77,85.746 v1(152.77,82.237) v1(161.867,82.237)
B10: J1.10 R6E.2 R7E.2 U1E.6 | length 52.5
  Top Layer w0.5: 135.719,97.808 137.249,97.808 138.392,98.951 138.392,102.38 140.17,104.158 148.425,104.158 148.436,104.148 149.5,104.148 149.893,103.754 150.186,103.461 150.186,102.397 151.219,101.364 U1E.6
  Top Layer w0.7: J1.10 130.7,81.16 130.7,90.6 133.7,93.6 R7E.2 ; R7E.2@135.719,93.617 135.719,97.808 R6E.2@135.719,101.618
B+: J3.1 Q1E.3 Q3E.3 Q5.3 Q6.2 R1E.2 R10.2 R13.2 U1E.8 | length 140.7
  Top Layer w0.5: v1(143.2,102.5) 143.335,102.5 143.932,103.097 148.295,103.097 Q3E.3 ; R1E.2@151.854,94.336 151.854,96.618 152.79,97.554 v1(152.766,97.578) 152.766,98.801 U1E.8 ; Q1E.3 161.884,100.134 161.884,97.616 v1(161.9,97.6) ; R10.2 v1(179.1,66.39) R13.2 ; Q5.3 205.2,71 Q6.2
  Top Layer w6: J3.1 184.497,90.997 193.203,90.997 205.339,78.861 205.339,71.6 Q6.2@205.3,71.6
  Bottom Layer w0.5: v1(143.2,102.5) 151.353,102.5 152.766,101.087 v1(152.766,97.578) ; v1@152.79,97.554 v1@161.887,97.554 ; v1(161.9,97.6) 176.7,97.6 ; v1(179.1,66.39) 176.7,68.79 176.7,97.6 ; J3.1 177.5,97.6 176.7,97.6 ; J3.1@187.355,91.432 J3.1@188.416,91.432
B-: D4.1 D5.1 P1.1 P2.1 pad.3 Q2A.3 Q4A.3 R3A.1 U1A.4 U2.4
  other v1: 157.1,28 160.1,29 148.8,33.9 147.7,35.4
L: J2.1 Q5.2 Q6.3 | length 36.8
  Top Layer w0.5: Q5.2 198.4,61.6 Q6.3
  Top Layer w6: J2.1 184.4,41.9 191,41.9 198.3,49.2 Q5.2
NetD1_1: D1.1 R8.1 | length 6
  Top Layer w0.7: D1.1 191.45,61.85 191.9,61.4 R8.1
NetD2_1: D2.1 R9.1 | length 6.1
  Top Layer w0.7: D2.1 190.2,74.99 190.61,75.4 R9.1
NetP1_3: P1.3 R10.1 | length 6.6
  Top Layer w0.5: R10.1 179.1,59.8 P1.3
NetP2_3: P2.3 R13.1 | length 11.5
  Top Layer w0.5: R13.1 179.1,78.1 181.1,80.1 P2.3
NetQ1A_2: Q1A.2 Q2A.2 R4A.1 R5A.1 | length 21.1
  Top Layer w0.7: Q2A.2 164.026,34.499 ; Q1A.2 164.026,34.499 ; R5A.1 169.1,34.499 ; R4A.1 169.1,34.499 ; 164.026,34.499 169.1,34.499
NetQ1B_2: Q1B.2 Q2B.2 R4B.1 R5B.1 | length 21.1
  Top Layer w0.7: Q2B.2 164.007,50.424 ; Q1B.2 164.007,50.424 ; R5B.1 169.081,50.424 ; R4B.1 169.081,50.424 ; 164.007,50.424 169.081,50.424
NetQ1C_2: Q1C.2 Q2C.2 R4C.1 R5C.1 | length 21.1
  Top Layer w0.7: Q2C.2 163.988,66.382 ; Q1C.2 163.988,66.382 ; R5C.1 169.062,66.382 ; R4C.1 169.062,66.382 ; 163.988,66.382 169.062,66.382
NetQ1D_2: Q1D.2 Q2D.2 R4D.1 R5D.1 | length 21.1
  Top Layer w0.7: Q2D.2 164.026,82.301 ; Q1D.2 164.026,82.301 ; R5D.1 169.1,82.301 ; R4D.1 169.1,82.301 ; 164.026,82.301 169.1,82.301
NetQ1E_2: Q1E.2 Q2E.2 R4E.1 R5E.1 | length 21.1
  Top Layer w0.7: Q2E.2 164.046,97.618 ; Q1E.2 164.046,97.618 ; R5E.1@169.12,93.617 169.12,97.618 ; R4E.1@169.12,101.618 169.12,97.618 ; 164.046,97.618 169.12,97.618
NetQ3A_2: Q3A.2 Q4A.2 R6A.1 R7A.1 | length 20.7
  Top Layer w0.7: R7A.1 R6A.1 ; 141.328,34.528 146.101,34.528 ; Q4A.2 146.101,34.528 ; Q3A.2 146.101,34.528
NetQ3B_2: Q3B.2 Q4B.2 R6B.1 R7B.1 | length 20.7
  Top Layer w0.7: R7B.1 R6B.1 ; 141.309,50.453 146.082,50.453 ; Q4B.2 146.082,50.453 ; Q3B.2 146.082,50.453
NetQ3C_2: Q3C.2 Q4C.2 R6C.1 R7C.1 | length 20.7
  Top Layer w0.7: R7C.1 R6C.1 ; 141.29,66.41 146.063,66.41 ; Q4C.2 146.063,66.41 ; Q3C.2 146.063,66.41
NetQ3D_2: Q3D.2 Q4D.2 R6D.1 R7D.1 | length 20.7
  Top Layer w0.7: R7D.1 R6D.1 ; 141.328,82.329 146.101,82.329 ; Q4D.2 146.101,82.329 ; Q3D.2 146.101,82.329
NetQ3E_2: Q3E.2 Q4E.2 R6E.1 R7E.1 | length 20.7
  Top Layer w0.7: R7E.1@141.319,93.617 R6E.1@141.319,101.618 ; 141.348,97.647 146.121,97.647 ; Q4E.2 146.121,97.647 ; Q3E.2 146.121,97.647
OUT1: D1.2 Q5.1 U2.1 | length 29.6
  Top Layer w0.7: U2.1@183.155,64.25 184.405,65.5 v1(189.7,65.5) 190.2,65 D1.2 ; v1(205.2,57.4) Q5.1
  Bottom Layer w0.7: v1(189.7,65.5) 197.8,57.4 v1(205.2,57.4)
OUT2: D2.2 Q6.1 U2.7 | length 18.5
  Top Layer w0.7: U2.7 184.425,68.775 184.425,67.585 184.835,67.175 189.475,67.175 190.2,67.9 D2.2 191.5,68.8 196.1,73.4 Q6.1

## Polygon pours and split planes (outlines as drawn)
B- on Top Layer "B-_L01_P000" (solid, pour order 0): 118,25.3 118,106.1 211,106.1 211,92.9 211,25.3
B- on Bottom Layer "B-_L02_P001" (solid, pour order 1): 118,25.3 118,106.1 211,106.1 211,92.9 211,25.3

## Other copper
Top Layer:
  region net B+: 206.5,64.3 208.7,67.7 201.9,67.7 203.9,64.3
  region net L: 197.1,68.3 194.9,64.9 201.7,64.9 199.7,68.3

## Silkscreen, mask and mechanical layers (free items; w line width, h text height)
Top Overlay:
  text "NPN" at 161.82,101.205 h1
  text "NPN" at 145.437,101.078 h1
  text "PNP" at 161.947,93.204 h1
  text "PNP" at 145.31,93.077 h1
  text "NPN" at 161.86,85.866 h1
  text "NPN" at 145.477,85.739 h1
  text "PNP" at 161.987,77.865 h1
  text "PNP" at 145.35,77.738 h1
  text "B10" at 130.4,76.86 h1
  text "B9" at 130.4,74.32 h1
  text "B8" at 130.4,71.78 h1
  text "NPN" at 161.822,69.947 h1
  text "NPN" at 145.439,69.82 h1
  text "B7" at 130.4,69.24 h1
  text "B6" at 130.4,66.7 h1
  text "B5" at 130.4,64.16 h1
  text "PNP" at 161.949,61.946 h1
  text "PNP" at 145.312,61.819 h1
  text "B4" at 130.4,61.62 h1
  text "B3" at 130.4,59.08 h1
  text "B2" at 130.4,56.54 h1
  text "B1" at 130.4,54 h1
  text "NPN" at 161.841,53.99 h1
  text "NPN" at 145.458,53.863 h1
  text "PNP" at 161.968,45.989 h1
  text "PNP" at 145.331,45.862 h1
  text "NPN" at 161.86,38.065 h1
  text "NPN" at 145.477,37.938 h1
  text "PNP" at 161.987,30.064 h1
  text "PNP" at 145.35,29.937 h1
Bottom Overlay:
  text "Battery +" at 176.7,90.033 h2.5
  text "BMS / 11S" at 168.5,52.8 h10
  text "Power +" at 176.6,39.5 h2.5
Mechanical 1:
  lines w0.1: 118,25.3 205.8,25.3 211,25.3 211,92.9 211,106.1 205.8,106.1 118,106.1 118,67 118,25.3